# Altium PCB DeskDigitalClock.PcbDoc
Units mm, origin at the board's own origin, x right, y up, seen from the top; angles counter-clockwise.
Board outline 85.75 x 102.75 mm, 2 copper layers (Top Layer, Bottom Layer), stack 1.071 mm thick; 69 components, 47 nets, 291 pads, 0 vias.
Unrouted connection lines stored in the file: 158.
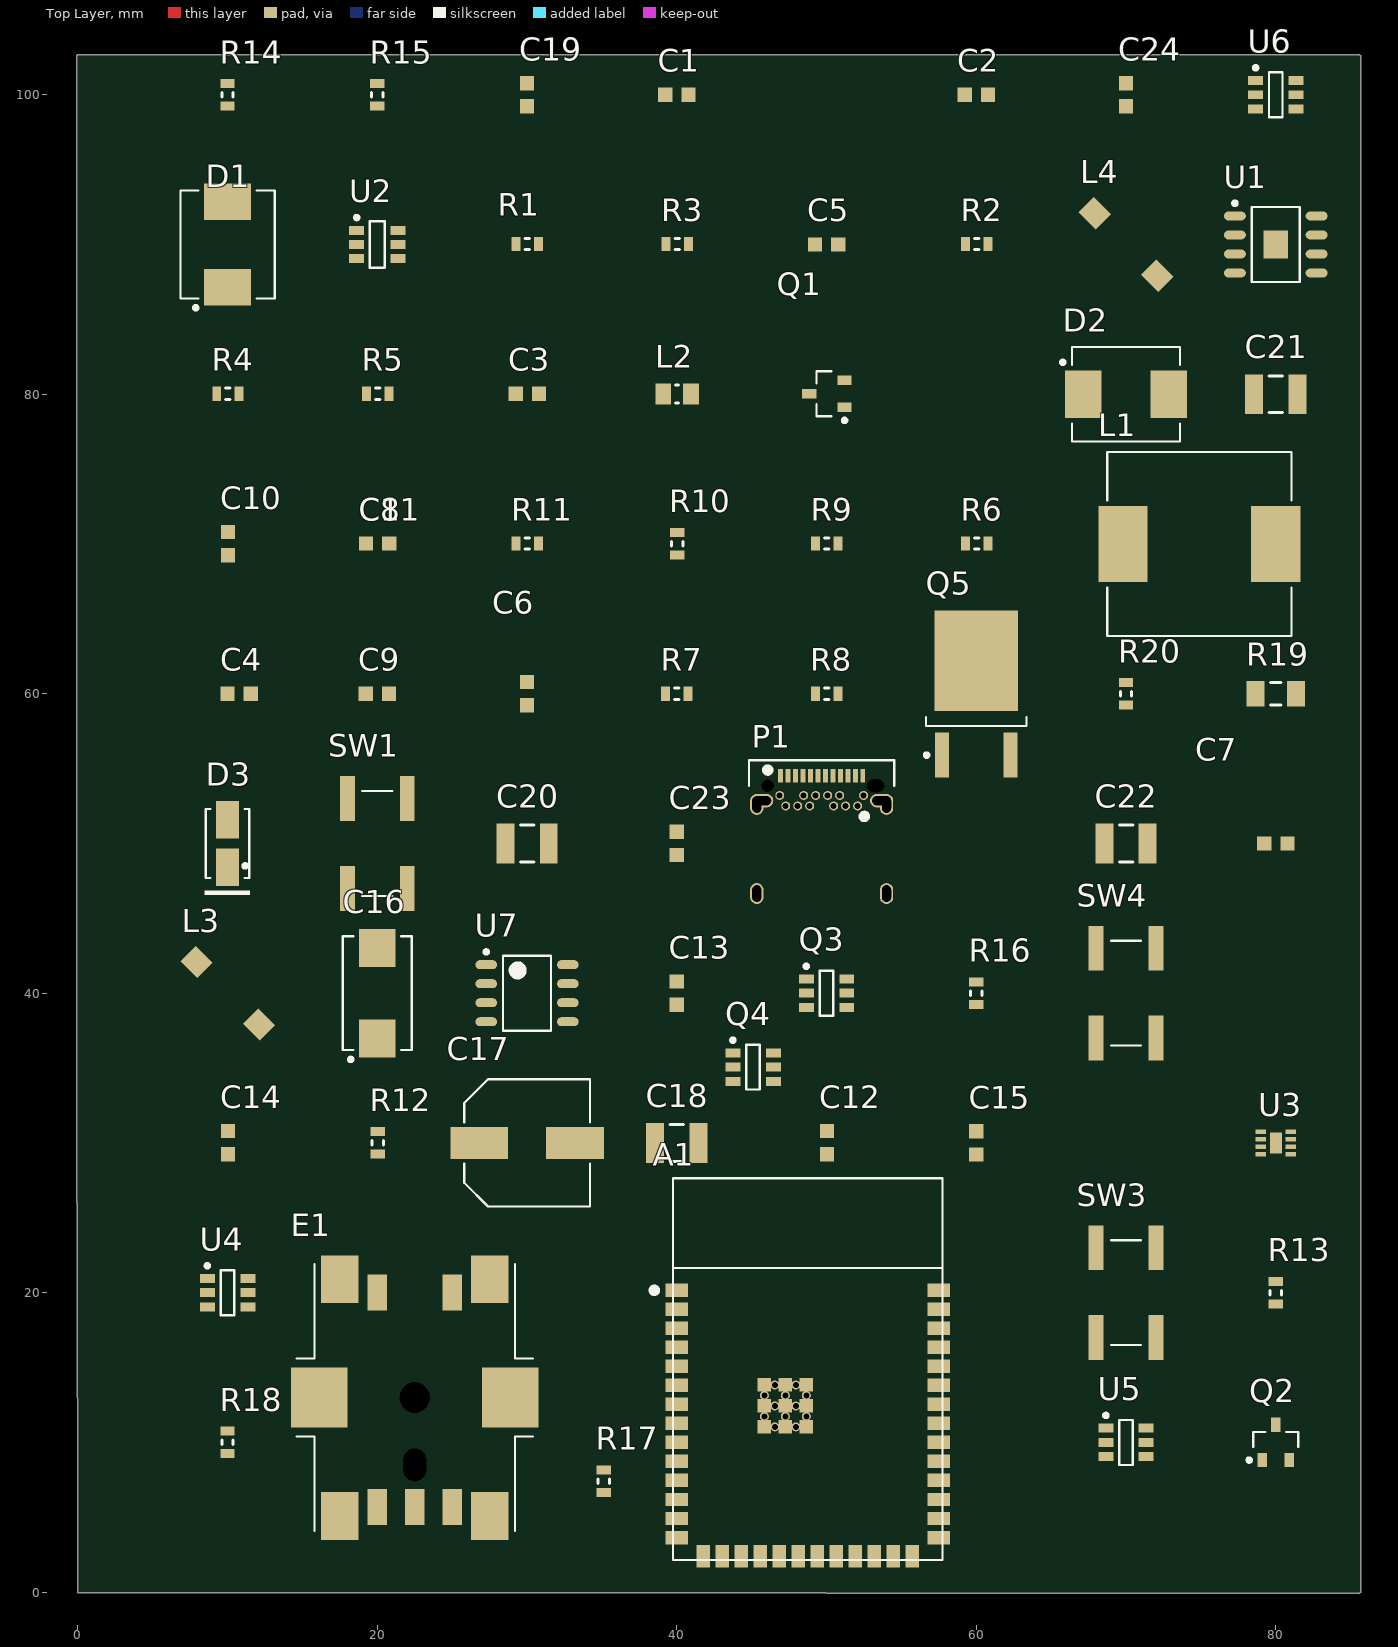
[diagram p0: Top Layer view]
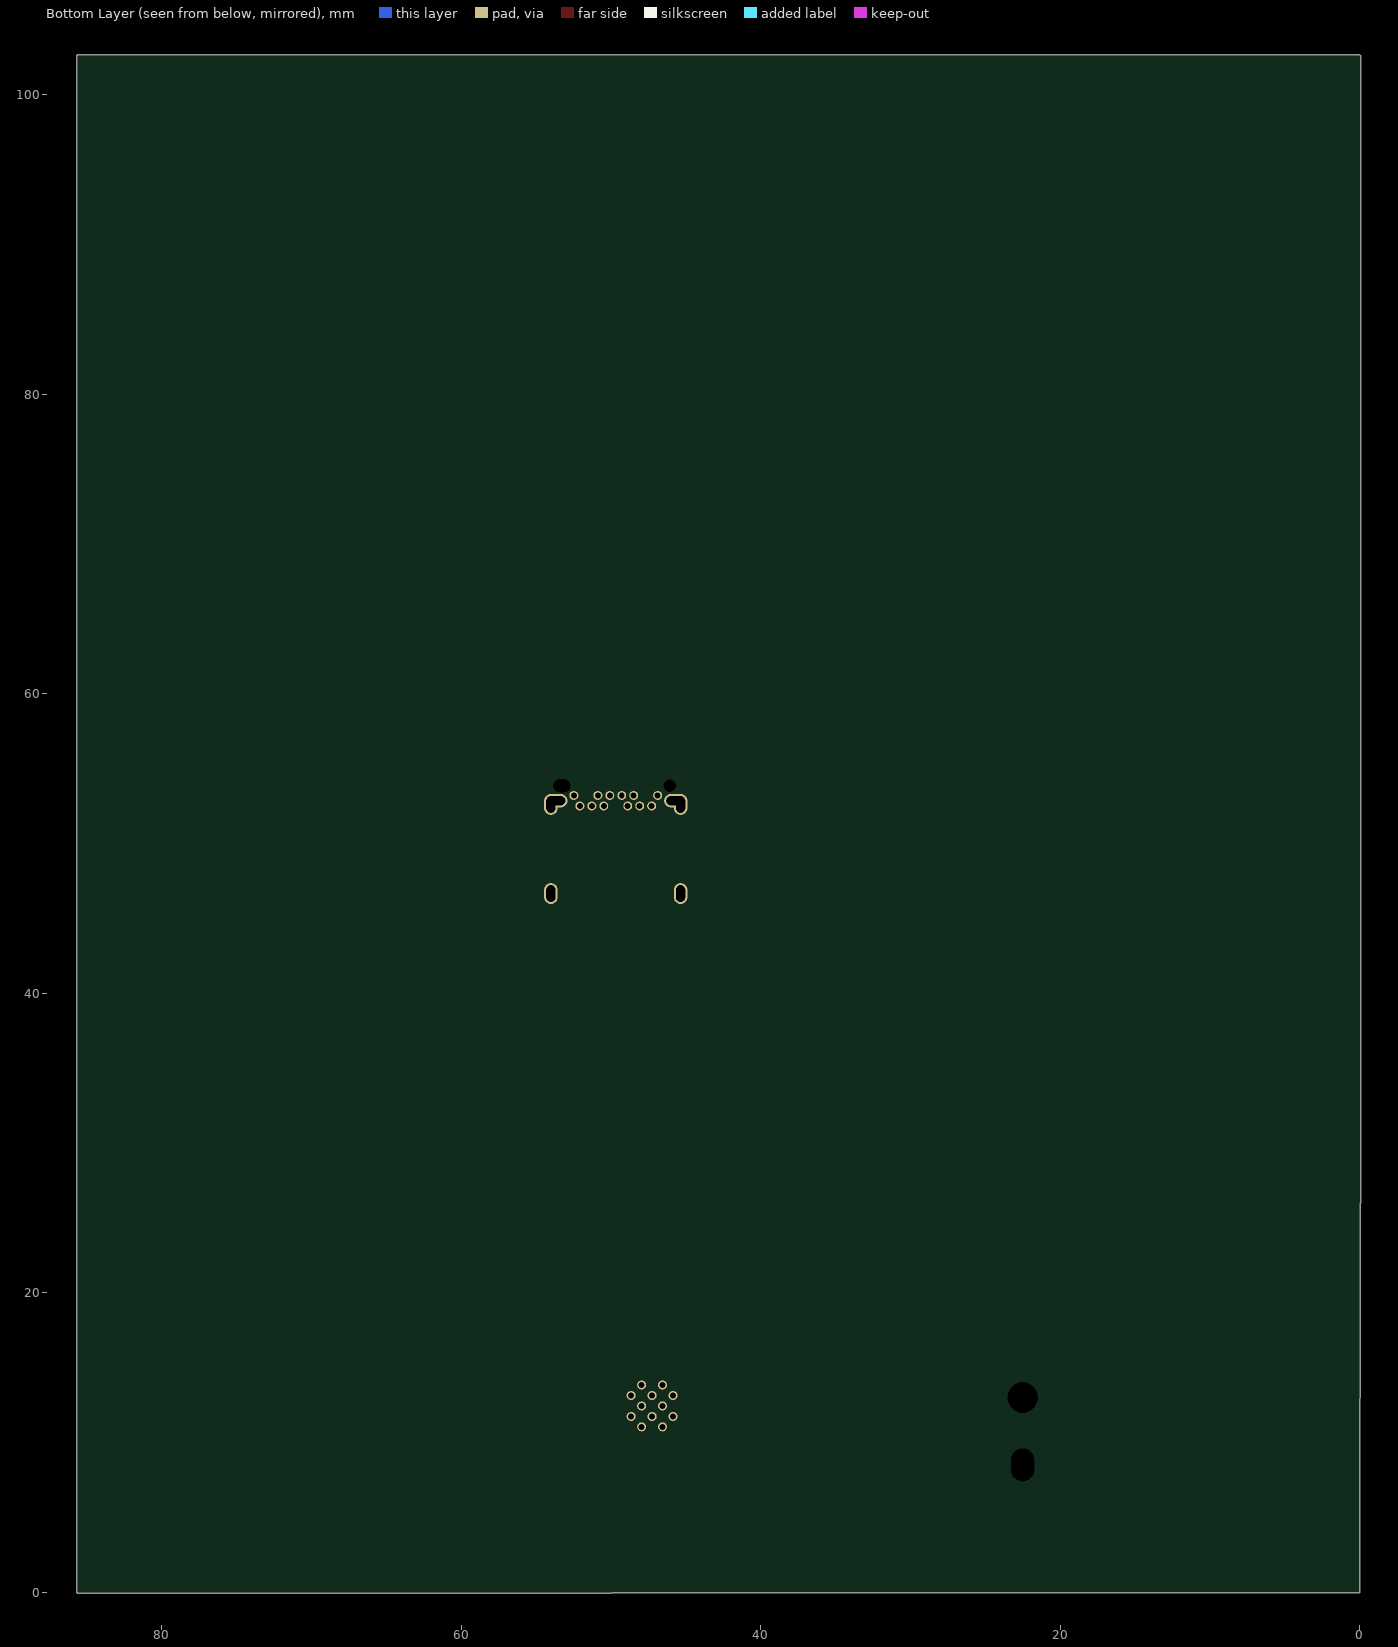
[diagram p1: Bottom Layer view, seen from below]

## Layer stack, top to bottom
Top Solder: solder mask 0.0102, Solder Resist, Dk 3.5
Top Layer: signal copper 0.0356
Dielectric 1: dielectric 1, FR-4, Dk 4.8
Bottom Layer: signal copper 0.0356
Bottom Solder: solder mask 0.0102, Solder Resist, Dk 3.5

## Board outline
0,-0.05 49.944,-0.05 50,-0.075 85.6,-0.075 85.675,0 85.675,102.6 85.6,102.675 0,102.675 -0.075,102.6 -0.075,26 -0.05,25.944

## Design rules (kind name [scope] priority, off if disabled: settings)
Clearance [All] p1: gap=0.15 ignorepadtopadclearanceinfootprint=FALSE except(0: Arc-Hole Track-Hole SMDPad-Hole THPad-Hole Via-Hole Fill-Hole Poly-Hole Region-Hole Text-Hole)
PolygonConnect [All] p1: connectstyle=Relief reliefconductorwidth=0.254 reliefentries=4 polygonreliefangle="90 Angle" airgapwidth=0.254
RoutingVias [All] p1: holewidth=0.4 width=0.8 viastyle="Through Hole" minholewidth=0.4 minwidth=0.3 maxholewidth=2 maxwidth=1.2
SolderMaskExpansion [All] p1: expansion=0.102 istentingtop=FALSE
Width [All] p1: maxlimit=1.5 minlimit=0.2 preferedwidth=0.3
30 further rules are at their usual default settings.

## Classes and differential pairs
component class Designator: C1 C2 C3 C4 C5 C6 C7 D1 L2 P1 Q1 Q2 Q3 Q4 R1 R2 R3 R4 R5 R13 U1 U2 U3 U5
component class Designator: C8 C9 C10 C11 E1 R6 R7 R8 R9 R10 R11 SW1
component class Designator: A1 C12 C13 C14 C15 R12 SW3 SW4

## Components (designator, comment, footprint, x,y, rotation, side; value= is the part's Value field where it differs from the comment)
A1 "ESP32-S3-WROOM-1" ESP32-S3-WROOM-1 40,20.16 r0 top
C1 "10u" C0603 40,100 r0 top
C2 "100n" C0603 60,100 r0 top
C3 "10n" C0603 30.028,80.028 r0 top
C4 "100n" C0603 10.775,60 r0 top
C5 "4.7u" C0603 50,90 r0 top
C6 "100n" C0603 30,60 r90 top
C7 "100n" C0603 80,50 r0 top
C8 "100n" C0603 20.028,70.028 r0 top
C9 "100n" C0603 20,60 r0 top
C10 "100n" C0603 10.028,70.028 r90 top
C11 "100n" C0603 20.028,70.028 r0 top
C12 "100n" C0603 50.028,30.028 r90 top
C13 "10u" C0603 40,40 r90 top
C14 "1u" C0603 10.028,30.028 r90 top
C15 "1u" C0603 60,30 r90 top
C16 "100u" CAPM3216X18N_TANTAL_E 20,40 r90 top
C17 "2.2u" CAP_8X10.2 30,30 r0 top
C18 "22u" C1210 40,30 r0 top
C19 "22p" C0603 30,100 r90 top
C20 "22u" C1210 30,50 r0 top
C21 "22u" C1210 80,80 r0 top
C22 "22u" C1210 70,50 r0 top
C23 "100n" C0603 40,50 r90 top
C24 "100n" C0603 70,100 r90 top
D1 "Value" DIOM6959X26N-SS54 10,90 r90 top
D2 "Value" DIOM6959X26N-SS54 70,80 r0 top
D3 "Value" DO-214AC(SMA) 10,50 r90 top
E1 "PEC11S-929K-S0015" PEC11S-929K-S0015 22.5,13 r0 top
L1 "100u" CD127-IND 74.9,70 r0 top
L2 "" C0805 40.028,80.028 r0 top
L3 "4.7u" CDRH5D16 10,40 r0 top
L4 "6.8u" CDRH5D16 70,90 r0 top
P1 "UJ31-CH-31N-SMT-TR" UJ31-CH-31N-SMT-TR 49.675,53.854 r0 top
Q1 "DMP1045U-7" SOT23127P600-8N 50.028,80.028 r90 top
Q2 "DMP1045U-7" SOT23127P600-8N 80,10 r0 top
Q3 "FS8205" SOT23-6-MT3420C 50,40 r0 top
Q4 "FS8205" SOT23-6-MT3420C 45.097,35.062 r0 top
Q5 "FQD12N20L" DPAK-fqd12n20l 60,60 r90 top
R1 "1.2k" R0603 30.028,90.028 r0 top
R2 "100" R0603 60.028,90.028 r0 top
R3 "1k" R0603 40.028,90.028 r0 top
R4 "5.1k" R0603 10.028,80.028 r0 top
R5 "5.1k" R0603 20.028,80.028 r0 top
R6 "10k" R0603 60.028,70.028 r0 top
R7 "10k" R0603 40,60 r0 top
R8 "10k" R0603 50,60 r0 top
R9 "10k" R0603 50.028,70.028 r0 top
R10 "10k" R0603 40.028,70.028 r90 top
R11 "10k" R0603 30.028,70.028 r0 top
R12 "10k" R0603 20.028,30.028 r90 top
R13 "1310k" R0603 80,20 r90 top
R14 "267k" R0603 10,100 r90 top
R15 "59k" R0603 20,100 r90 top
R16 "88.7k" R0603 60,40 r90 top
R17 "12.1k" R0603 35.119,7.41 r90 top
R18 "3.92k" R0603 10,10 r90 top
R19 "0.05" R1206 80,60 r0 top
R20 "3.3k" R0603 70,60 r90 top
SW1 "KSC241JLFS" KSC241JLFS 20,50 r90 top
SW3 "KSC241JLFS" KSC241JLFS 70,20 r90 top
SW4 "KSC241JLFS" KSC241JLFS 70,40 r90 top
U1 "TP4056-42-ESOP8" TP4056-SOIC8-TP 80,90 r0 top
U2 "USBLC6-2SC6" SOT23-6L-USBLC6-2SC6 20,90 r0 top
U3 "MAX17048G+" "8 TDFN-EP-MAX17048G+" 80,30 r0 top
U4 "MT3420C" SOT23-6-MT3420C 10,20 r0 top
U5 "DW01A" SOT23-6-MT3420C 70,10 r0 top
U6 "MT3608" SOT23-6-MT3420C 80,100 r0 top
U7 "MAX1771ESA" MAX1771ESA 30,40 r0 top

## Footprints (in the part's own frame and the unit in brackets; to place one, negate y for a bottom-side part, rotate by r counter-clockwise, add the part's x,y. Pads: shape width x height; smd on the part's side, far side on the other; paste and mask are expansions set on the pad)
"8 TDFN-EP-MAX17048G+" [mm]
  rect 0.7x0.3 smd: 1(-0.99,0.75) 2(-0.99,0.25) 3(-0.99,-0.25) 4(-0.99,-0.75) 5(0.99,-0.75) 6(0.99,-0.25) 7(0.99,0.25) 8(0.99,0.75)
  rect 0.8x1.38 smd: 9(0,0)
C0603 [mm] "Chip Capacitor, 2-Leads, Body 1,60x0,80mm, IPC Medium Density"
  rect 0.95x0.95 smd: 1(-0.775,0) 2(0.775,0)
  body extent -0.8,-0.4 0.8,0.4, height 0.8
C0805 [mm] "Chip Capacitor, 2-Leads, Body 2,00x1,25mm, IPC Medium Density"
  rect 1.05x1.4 smd: 1(-0.925,0) 2(0.925,0)
  silkscreen extent -0.1,-0.6 0.1,0.6, body extent -1,-0.62 1,0.63, height 0.6
C1210 [mm] "Chip Capacitor, 2-Leads, Body 3,20x2,50mm, IPC Medium Density"
  rect 1.2x2.65 smd: 1(-1.45,0) 2(1.45,0)
  silkscreen extent -0.45,-1.22 0.45,1.23, body extent -1.6,-1.25 1.6,1.25, height 0.77
CAP_8X10.2 [mm] "Aluminum Electrolytic Capacitor, Body 8,25x8,30x10,70mm, IPC Medium Density"
  rect 3.85x2.15 smd: 1(-3.2,0) 2(3.2,0)
  silkscreen extent -4.2,-4.25 4.2,4.25, body extent -4.3,-4.25 4.3,4.25, height 10.7
CAPM3216X18N_TANTAL_E [mm]
  rect 2.55x2.45 smd: 1(-3.025,0) 2(3.025,0)
  silkscreen extent -4.55,-2.3 3.8,2.3, body extent -4.02,-2.3 4.02,2.3, height 4.3
CD127-IND [mm] "Precision Wire Wound Inductor, 2-Leads, Body 12,00x12,00mm, IPC Medium Density"
  rect 3.3x5.1 smd: 1(-5.1,0) 2(5.1,0)
  silkscreen extent -6.15,-6.15 6.15,6.15, body extent -6,-6 6,6, height 7.47
CDRH5D16 [mm]
  rect 1.45x1.6 smd rot 45: 1(2.086,-2.086) 2(-2.086,2.086)
  body extent -2.9,-2.9 2.9,2.9, height 1.8
DIOM6959X26N-SS54 [mm] "Molded Diode, 2-Leads, Body 6,86x5,91mm, IPC Medium Density"
  rect 2.45x3.15 smd: 1(-2.85,0) 2(2.85,0)
  silkscreen extent -4.35,-3.15 3.6,3.15, body extent -3.77,-3.11 3.77,3.11, height 2.62
DO-214AC(SMA) [mm]
  rect 2.5x1.55 smd: 1(-1.575,0) 2(1.575,0)
  silkscreen extent -3.42,-1.5 2.3,1.53, body extent -2.52,-1.45 2.52,1.45, height 2.44
DPAK-fqd12n20l [mm] "D-PAK, 3-Pads, Body 6,20x6,72mm (max), IPC Medium Density"
  rect 6.7x5.55 smd: D(2.2,0)
  rect 3x0.95 smd: G(-4.1,2.29) S(-4.1,-2.29)
  silkscreen extent -4.22,-3.35 -1.55,3.44, body extent -4.45,-3.35 5.45,3.35, height 2.52
ESP32-S3-WROOM-1 [mm]
  rect 1.5x0.9 smd: 1(0,0) 2(0,-1.27) 3(0,-2.54) 4(0,-3.81) 5(0,-5.08) 6(0,-6.35) 7(0,-7.62) 8(0,-8.89) 9(0,-10.16) 10(0,-11.43) 11(0,-12.7) 12(0,-13.97) 13(0,-15.24) 14(0,-16.51) 27(17.5,-16.51) 28(17.5,-15.24) 29(17.5,-13.97) 30(17.5,-12.7) 31(17.5,-11.43) 32(17.5,-10.16) 33(17.5,-8.89) 34(17.5,-7.62) 35(17.5,-6.35) 36(17.5,-5.08) 37(17.5,-3.81) 38(17.5,-2.54) 39(17.5,-1.27) 40(17.5,0)
  rect 0.9x1.5 smd: 15(1.765,-17.76) 16(3.035,-17.76) 17(4.305,-17.76) 18(5.575,-17.76) 19(6.845,-17.76) 20(8.115,-17.76) 21(9.385,-17.76) 22(10.655,-17.76) 23(11.925,-17.76) 24(13.195,-17.76) 25(14.465,-17.76) 26(15.735,-17.76)
  rect 0.9x0.9 smd: 41(5.85,-9.12) 41(5.85,-7.72) 41(5.85,-6.32) 41(7.25,-9.12) 41(7.25,-7.72) 41(7.25,-6.32) 41(8.65,-9.12) 41(8.65,-7.72) 41(8.65,-6.32)
  round 0.6 hole 0.4: 41(5.85,-8.425) 41(5.85,-7.025) 41(6.55,-9.12) 41(6.55,-7.72) 41(6.55,-6.32) 41(7.25,-8.425) 41(7.25,-7.025) 41(7.95,-9.12) 41(7.95,-7.725) 41(7.95,-6.32) 41(8.65,-8.425) 41(8.65,-7.025)
  silkscreen extent -1.75,-18.01 17.75,7.49, body extent -0.25,-18.01 17.77,7.5, height 3.11
KSC241JLFS [mm]
  rect 3x1 smd: 1(-3,2) 2(3,2) 3(3,-2) 4(-3,-2)
  silkscreen extent -3.5,-1 3.5,1, body extent -3.4,-3.15 3.4,3.15, height 3.5
MAX1771ESA [mm] "SOIC, 8-Leads, Body 4,90x3,90mm, Pitch 1,27mm, IPC Medium Density"
  oval 1.45x0.6 smd: 1(-2.725,1.905) 2(-2.725,0.635) 3(-2.725,-0.635) 4(-2.725,-1.905) 5(2.725,-1.905) 6(2.725,-0.635) 7(2.725,0.635) 8(2.725,1.905)
  silkscreen extent -2.85,-2.5 1.6,2.88, body extent -3,-2.5 3,2.5, height 1.75
PEC11S-929K-S0015 [mm]
  rect 3.75x4 smd: 1(-6.375,0) 1(6.375,0)
  rect 2.5x3.2 smd: 1(-5,-7.9) 1(-5,7.9) 1(5,-7.9) 1(5,7.9)
  round 0.6 hole 1.55 slot 2.2 at 90 deg unplated: 2(0,-4.5)
  round 0.6 hole 2.05 unplated: 2(0,0)
  rect 1.3x2.4 smd: A(-2.5,-7.3) B(2.5,-7.3) C(0,-7.3) D(-2.5,7) E(2.5,7)
  silkscreen extent -7.9,-8.91 7.9,8.91, body extent -8.04,-9.68 8.03,9.63, height 24.4
R0603 [mm] "Chip Resistor"
  rect 0.6x0.95 smd: 1(-0.75,0) 2(0.75,0)
  silkscreen extent -0.15,-0.38 0.15,0.38, body extent -0.8,-0.45 0.8,0.45, height 0.5
R1206 [mm] "Chip Resistor"
  rect 1.2x1.7 smd: 1(-1.35,0) 2(1.35,0)
  silkscreen extent -0.35,-0.75 0.35,0.75, body extent -1.6,-0.8 1.6,0.8, height 0.6
SOT23-6-MT3420C [mm] "SOT23, 6-Leads, Body 2,90x2,80mm, Pitch 0,95mm, IPC Medium Density"
  rect 1x0.6 smd: 1(-1.35,0.95) 2(-1.35,0) 3(-1.35,-0.95) 4(1.35,-0.95) 5(1.35,0) 6(1.35,0.95)
  silkscreen extent -1.47,-1.5 0.45,1.92, body extent -1.5,-1.5 1.5,1.5, height 1.45
SOT23-6L-USBLC6-2SC6 [mm] "SOT23, 6-Leads, Body 2,93x2,80mm, Pitch 0,95mm, IPC Medium Density"
  rect 1x0.6 smd: 1(-1.375,0.95) 2(-1.375,0) 3(-1.375,-0.95) 4(1.375,-0.95) 5(1.375,0) 6(1.375,0.95)
  silkscreen extent -1.5,-1.55 0.5,1.92, body extent -1.5,-1.53 1.5,1.53, height 1.45
SOT23127P600-8N [mm]
  rect 0.65x0.95 smd: D(0,1.175) G(-0.9,-1.175) S(0.9,-1.175)
  silkscreen extent -1.9,-1.3 1.5,0.7, body extent -1.5,-0.7 1.5,0.7, height 1
TP4056-SOIC8-TP [mm]
  oval 1.45x0.6 smd: 1(-2.725,1.905) 2(-2.725,0.635) 3(-2.725,-0.635) 4(-2.725,-1.905) 5(2.725,-1.905) 6(2.725,-0.635) 7(2.725,0.635) 8(2.725,1.905)
  rect 1.65x1.9 smd: 9(0,0)
  silkscreen extent -2.85,-2.5 1.6,2.88, body extent -3,-2.5 3,2.5, height 1.75
UJ31-CH-31N-SMT-TR [mm]
  oval 0.9x1.4 hole 0.6 slot 1.1 at 90 deg: 0(-4.33,-7.2) 0(-4.33,-1.25) 0(4.33,-7.2) 0(4.33,-1.25)
  oval 1.55x0.9 hole 0.6 slot 1.25 at 0 deg: 0(-4.005,-1) 0(4,-1)
  round 0 hole 0.85 unplated: 0(-3.6,0)
  round 0 hole 0.85 slot 1.15 at 0 deg unplated: 0(3.6,0)
  rect 0.32x0.9 smd: A1(-2.75,0.66) A2(-2.25,0.66) A3(-1.75,0.66) A4(-1.25,0.66) A5(-0.75,0.66) A6(-0.25,0.66) A7(0.25,0.66) A8(0.75,0.66) A9(1.25,0.66) A10(1.75,0.66) A11(2.25,0.66) A12(2.75,0.66)
  round 0.6 hole 0.4: B1(2.8,-0.65) B2(2.4,-1.35) B3(1.6,-1.35) B4(1.2,-0.65) B5(0.8,-1.35) B6(0.4,-0.65) B7(-0.4,-0.65) B8(-0.8,-1.35) B9(-1.2,-0.65) B10(-1.6,-1.35) B11(-2.4,-1.35) B12(-2.8,-0.65)
  silkscreen extent -4.85,-2.3 4.85,1.7, body extent -4.85,-9.6 4.85,1.7, height 3.2

## Part data
A1: "2.4 GHz Wi-Fi (802.11 b/g/n) and Bluetooth® 5 (LE) module", Manufacturer=espressif, Datasheet=https://www.espressif.com/sites/default/files/documentation/esp32-s3-wroom-1_wroom-1u_datasheet_en.pdf, P/N=ESP32-S3-WROOM-1
C1 C2 C3 C4 C5 C6 C7 C8 C9 C10 C11 C12 C13 C14 C15 C18 C19 C20 C21 C22 C23 C24: library part Cap, "CAPACITOR"
C16: library part Cap_p, "CAPACITOR", Voltage=16v
C17: library part Cap_p, "CAPACITOR", Voltage=300v
D1 D2: library part Diode_Shottky, "Diode Shottky", Datasheet=https://static.chipdip.ru/lib/321/DOC005321659.pdf, P/N=SS54
D3: library part US1M, "1.0A SURFACE MOUNT ULTRA-FAST RECTIFIER", Manufacturer=Vishay, Datasheet=https://www.vishay.com/docs/88768/us1_test_dcicons.pdf, P/N=US1M
E1: "ROTARY ENCODER MECHANICAL 15PPR", Manufacturer=Bourns, Datasheet=https://www.bourns.com/docs/product-datasheets/pec11s.pdf?sfvrsn=601089f1_5, P/N=PEC11S-929K-S0015, Supplier 1=Aliexpress, Supplier Part Number 1=https://ru.aliexpress.com/item/32982414097.html?spm=a2g0o.productlist.0.0.66c8dd40JI3Wx0&algo_pvid=9a118981-c070-4602-89dc-e0076a1d9175&algo_expid=9a118981-c070-4602-89dc-e0076a1d9175-0&btsid=fce86d33-42b5-41e8-9f27-e9f4b1b87b22&ws_ab_test=searchweb0_0,searchweb201602_7,searchweb201603_52
L1 L3 L4: library part Ind, "INDUCTOR"
  L3: P/N=CDRH5D16NP-4R7NC
  L4: P/N=CDRH5D16NP-680MC
L2: library part Ind, "Ferrite Bead", P/N=blm21pg221s
P1: "CONN RCPT USB3.1 TYPEC 24POS R/A", Manufacturer="CUI Devices", Datasheet=https://www.cuidevices.com/product/resource/uj31-ch-smt.pdf, P/N=UJ31-CH-31N-SMT-TR
Q1 Q2: "P-CHANNEL ENHANCEMENT MODE MOSFET", Manufacturer="Diodes Incorporated", Datasheet=https://www.diodes.com/assets/Datasheets/DMP1045U.pdf, P/N=DMP1045U-7
Q3 Q4: "Dual n-Channel Enhancement Mode power MOSFET", Manufacturer=Fortune, Datasheet=https://datasheet.lcsc.com/lcsc/1810110910_Fortune-Semicon-FS8205_C32254.pdf, P/N=FS8205
Q5: "n-Channel QFET MOSFET 200V 9A 280mOhm", Manufacturer="Fairchild Semiconductor", Package=D-PAK, Datasheet=https://www.onsemi.com/download/data-sheet/pdf/fqd12n20l-d.pdf, P/N=FQD12N20L
R1 R2 R3 R4 R5 R6 R7 R8 R9 R10 R11 R12 R13 R14 R15 R16 R17 R18 R19 R20: library part Res, "RESISTOR"
SW1 SW3 SW4: "SWITCH TACTILE SPST-NO 50mA @ 32VDC", Manufacturer=C&K, Datasheet=https://www.ckswitches.com/media/1968/ksc2.pdf, P/N=KSC241JLFS
U1: "1A Standalone Linear Li-lon Battery Charger with Thermal / Regulation in SOP-8", Manufacturer=TopPower, Datasheet=https://datasheet.lcsc.com/lcsc/1809261820_TOPPOWER-Nanjing-Extension-Microelectronics-TP4056-42-ESOP8_C16581.pdf, Datasheet_EN=https://dlnmh9ip6v2uc.cloudfront.net/datasheets/Prototyping/TP4056.pdf*, P/N=TP4056-42-ESOP8
U2: "TVS DIODE 5.25V 17V SOT23-6", Manufacturer=STMicroelectronics, Datasheet=https://www.st.com/content/ccc/resource/technical/document/datasheet/06/1d/48/9c/6c/20/4a/b2/CD00050750.pdf/files/CD00050750.pdf/jcr:content/translations/en.CD00050750.pdf, P/N=USBLC6-2SC6
U3: "Micropower 1 Cell Li+ ModelFuel Gauge", Manufacturer="Maxim Integrated", Datasheet=https://datasheetspdf.com/pdf-file/929924/MaximIntegrated/MAX17048/1, P/N=MAX17048G+
U4: "2A 2.3-6V Input 1.5MHz Synchronous Step-Down Converter", Manufacturer=Aerosemi, Datasheet=https://datasheet.lcsc.com/lcsc/1806041635_XI-AN-Aerosemi-Tech-MT3420C_C181741.pdf, P/N=MT3420C
U5: "2A 2.3-6V Input 1.5MHz Synchronous Step-Down Converter", Manufacturer=HMsemi, Datasheet=https://hmsemi.com/downfile/DW01A.PDF, P/N=DW01A
U6: "High Efficiency 1.2MHz 2A Step Up Converter", Manufacturer=Aerosemi, Datasheet=https://www.olimex.com/Products/Breadboarding/BB-PWR-3608/resources/MT3608.pdf, P/N=MT3608
U7: "12V or Adjustable, High-Efficiency, / Low IQ, Step-Up DC-DC Controller", Manufacturer=Maxim, Datasheet=https://static.chipdip.ru/lib/300/DOC000300892.pdf, P/N=MAX1771ESA

## Nets (pads, with @x,y where several pads share a name; then routed paths per layer and width w, separated by ;. In a path a pad name is that pad's centre, name@x,y a point inside that pad or via, vN(x,y) a via of type N, cw(c..) or ccw(c..) an arc to the next point about the centre after c; other vN are vias at no path point)
3.3V: A1.2 C12.1 C13.1 C19.2 C20.2 L3.2 R12.2 R14.2
5V: C4.2 C5.2 C16.1 C22.2 C23.2 D2.2 L1.1 L2.2 R16.2 U7.2
5Vlocal: C2.2 Q1.G U1.4 U1.8
180V: C17.1 D3.1 R18.2
B+: C1.2 C6.2 Q1.D Q2.D R2.2 U1.5 U3.2 U3.3
B-: C7.1 Q3.1 Q4.1 U5.6
BorUSB: D1.1 Q1.S Q2.S
CHIP_PU: A1.3 C14.1 R12.1 SW3.2
GND: A1.1 A1.40 A1.41 C1.1 C2.1 C3.1 C4.1 C5.1 C6.1 C8.1 C9.1 C10.1 C11.1 C12.2 C13.2 C14.2 C15.2 C16.2 C17.2 C18.1 C20.1 C21.1 C22.1 C23.1 C24.1 E1.C E1.D P1.A1 P1.A12 P1.B1 P1.B12 Q3.3 Q4.3 R1.1 R3.1 R4.1 R5.1 R13.1 R15.1 R17.1 R19.1 R20.1 SW1.1 SW3.3 SW4.4 U1.1 U1.3 U2.2 U3.1 U3.4 U3.6 U3.9 U4.2 U6.2 U7.4 U7.6 U7.7
GPIO0: A1.27 C15.1 SW4.1
NetC7_2: C7.2 R2.1 U5.5
NetC8_2: C8.2 E1.E R8.1
NetC9_2: C9.2 R9.1 SW1.4
NetC10_2: C10.2 R10.2
NetC11_2: C11.2 R11.2
NetC19_1: C19.1 R14.1 R15.2 U4.6
NetC24_2: C24.2 U7.5
NetD1_2: D1.2 Q2.G R13.2
NetD2_1: D2.1 L4.2 U6.1
NetD3_2: D3.2 L1.2 Q5.D
NetE1_A: E1.A R6.1 R10.1
NetE1_B: E1.B R7.1 R11.1
NetL3_1: L3.1 U4.3
NetP1_A5: P1.A5 R4.2
NetP1_A6: P1.A6 P1.B6 U2.3
NetP1_A7: P1.A7 P1.B7 U2.1
NetP1_B5: P1.B5 R5.2
NetQ3_2: Q3.2 Q3.5 Q4.2 Q4.5
NetQ3_4: Q3.4 Q4.4 U5.3
NetQ3_6: Q3.6 Q4.6 U5.1
NetQ5_G: Q5.G U7.1
NetQ5_S: Q5.S R19.2 U7.8
NetR1_2: R1.2 U1.2
NetR3_2: R3.2 U5.2
NetR16_1: R16.1 R17.2 U6.3
NetR18_1: R18.1 R20.2 U7.3
NetU1_6: U1.6
NetU1_7: U1.7
NetU2_4: U2.4
NetU2_6: U2.6
NetU3_5: U3.5
NetU3_7: U3.7
NetU3_8: U3.8
PP_V: C18.2 C21.2 L4.1 U4.1 U4.4 U6.4 U6.5
SHELL: P1.0
Vdd: R6.2 R7.2 R8.2 R9.2
VUSB: C3.2 L2.1 P1.A4 P1.A9 P1.B4 P1.B9 U2.5
pads on no net: A1.4 A1.5 A1.6 A1.7 A1.8 A1.9 A1.10 A1.11 A1.12 A1.13 A1.14 A1.15 A1.16 A1.17 A1.18 A1.19 A1.20 A1.21 A1.22 A1.23 A1.24 A1.25 A1.26 A1.28 A1.29 A1.30 A1.31 A1.32 A1.33 A1.34 A1.35 A1.36 A1.37 A1.38 A1.39 E1.1 E1.2 P1.A2 P1.A3 P1.A8 P1.A10 P1.A11 P1.B2 P1.B3 P1.B8 P1.B10 P1.B11 SW1.2 SW1.3 SW3.1 SW3.4 SW4.2 SW4.3 U1.9 U4.5 U5.4 U6.6

## Silkscreen, mask and mechanical layers (free items; w line width, h text height)
Mechanical 1:
  lines w0.1: 0,30 0,0 50,0
  lines w0.15: 0,26 0,102.6 85.6,102.6 85.6,0 50,0

## Text inside footprints (layer, text, board x,y; h text height)
P1: Mechanical 1 "PCB Line" at 47.871,44.504 h0.5